# Altium PCB SFCslaver.PcbDoc (part 4 of 6)
Units mm, origin at the board's own origin, x right, y up, seen from the top; angles counter-clockwise.
Board outline 149.66 x 75.74 mm, 2 copper layers (Top Layer, Bottom Layer); 284 components, 212 nets, 830 pads, 310 vias.
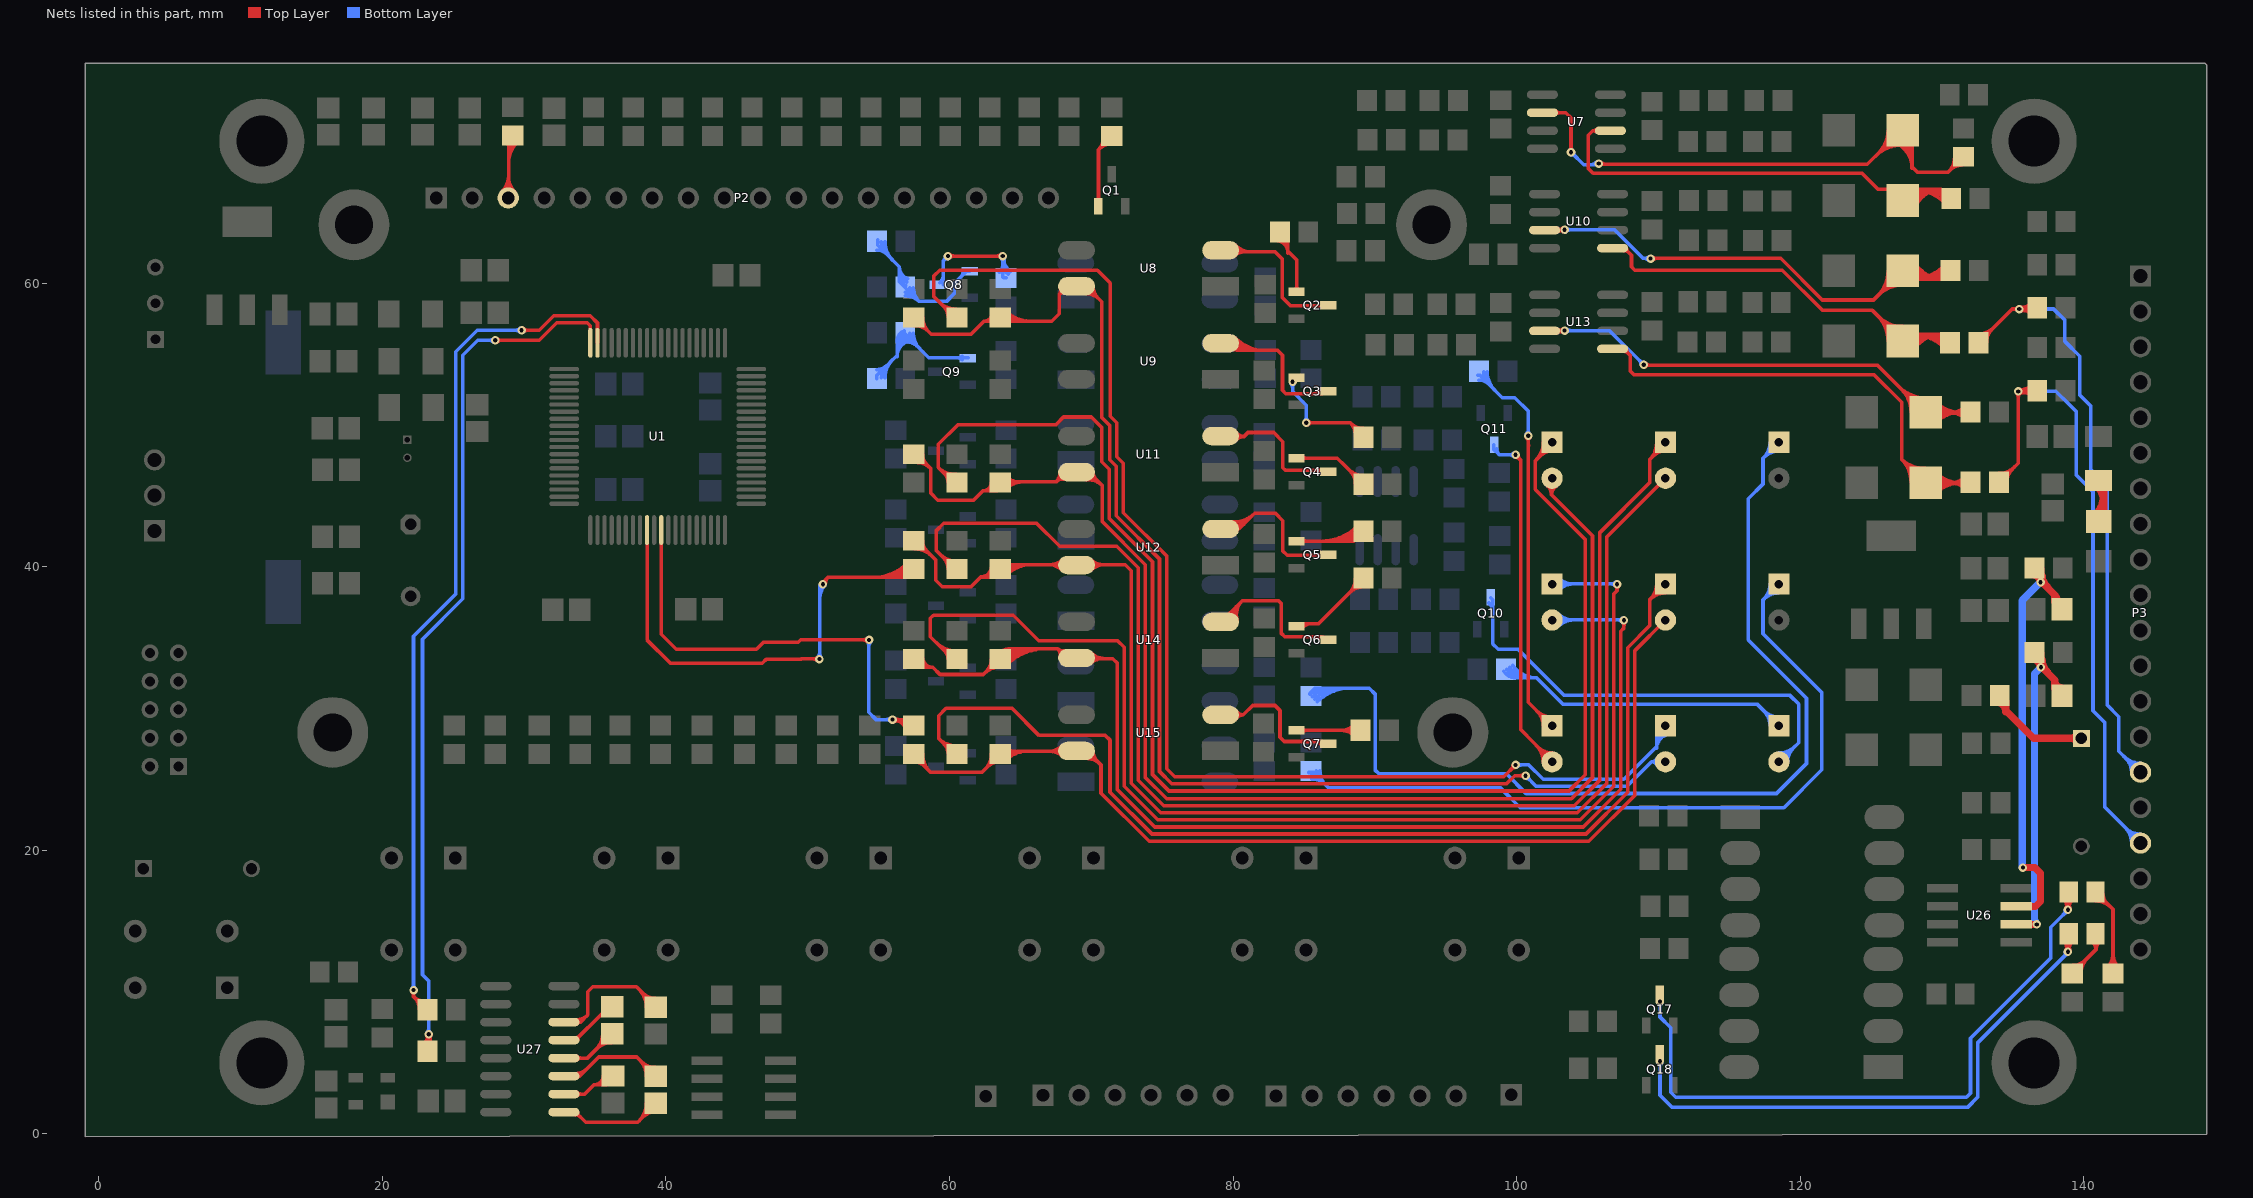
[diagram p4: the nets of this part, all layers, seen from the top]

## Via types
v1: diameter 0.6, hole 0.3, Top Layer to Bottom Layer, 310 vias

## Nets (pads, with @x,y where several pads share a name; then routed paths per layer and width w, separated by ;. In a path a pad name is that pad's centre, name@x,y a point inside that pad or via, vN(x,y) a via of type N, cw(c..) or ccw(c..) an arc to the next point about the centre after c; other vN are vias at no path point) (continued)
LEVEL_LOW1: R80.2 U1.29 | length 44.3
  Top Layer w0.254: U1.29@38.673,42.579 38.673,34.826 40.325,33.174 46.797,33.174 47.1,33.477 49.545,33.477 49.556,33.489 v1@50.687,33.489 ; 50.38,33.489 cw(c50.38,33.032) v1@50.703,33.355 ; 50.436,33.489 ccw(c50.436,33.867) v1@50.703,33.6 ; v1@50.952,38.76 51.435,39.243 ; v1@51.252,38.769 cw(c51.878,38.8) 51.435,39.243 ; 54.651,39.243 ccw(c54.651,42.603) R80.2@57.027,40.227 ; 55.264,39.243 ccw(c55.264,41.99) R80.2@57.206,40.048 ; 55.877,39.243 ccw(c55.877,41.377) R80.2@57.386,39.868 ; 56.49,39.243 ccw(c56.49,40.764) R80.2@57.566,39.688 ; R80.2@57.33,39.552 57.679,39.552 57.37,39.243 51.435,39.243
  Bottom Layer w0.254: v1@50.703,33.6 ccw(c50.346,33.956) 50.851,33.956 ; v1@50.851,33.528 50.851,38.684 50.927,38.76 v1(51.079,38.76) ; 50.851,33.834 ccw(c51.182,33.834) v1@50.948,33.6 ; 50.851,37.791 cw(c52.049,37.791) v1@51.202,38.638 ; 50.851,38.404 cw(c51.436,38.404) v1@51.022,38.818
  other v1: 50.825,33.477
LEVEL_LOW1_PORT: P3.15 R60.1 R62.2 | length 56.8
  Top Layer w0.254: R62.2@132.436,55.524 132.436,55.651 134.95,58.166 R60.1@136.675,58.166 ; R62.2@132.572,56.147 ccw(c132.572,57.016) R62.2@133.186,56.402 ; R62.2@132.572,56.401 ccw(c132.572,57.883) 133.619,56.835 ; R62.2@132.891,55.828 cw(c133.563,55.828) R62.2@133.088,56.304 ; R62.2@133.145,55.828 cw(c134.43,55.828) 133.521,56.737 ; v1@135.264,58.166 ccw(c135.264,59.653) R60.1@136.315,58.602 ; v1@135.336,58.044 ccw(c135.041,57.748) 135.041,58.166 ccw(c135.041,58.584) v1@135.336,58.288 ; v1@135.411,58.166 cw(c135.411,56.886) R60.1@136.315,57.791 ; v1@135.545,58.016 cw(c135.733,57.691) 135.83,58.054 ; v1@135.545,58.316 ccw(c135.668,58.529) 135.731,58.291 ; v1@135.581,58.044 cw(c135.876,57.748) 135.876,58.166 cw(c135.876,58.584) v1@135.581,58.288 ; v1@135.608,58.079 cw(c136.118,57.785) 135.966,58.354 ; v1@135.608,58.252 ccw(c136.006,58.482) 135.887,58.038 ; 135.877,58.166 ccw(c135.877,59.04) R60.1@136.495,58.422
  Bottom Layer w0.254: v1(135.458,58.166) 137.871,58.166 138.671,57.366 138.671,55.881 139.72,54.832 139.72,52.098 140.482,51.336 140.482,46.86 141.648,45.693 141.648,30.239 142.469,29.419 142.469,26.975 143.967,25.476 P3.15@144.345,25.476 ; v1@135.581,58.044 cw(c135.876,57.748) 135.876,58.166 cw(c135.876,58.584) v1@135.581,58.288 ; 142.84,26.604 ccw(c144,27.764) P3.15@144,26.123 ; 142.976,26.467 cw(c142.01,25.5) P3.15@143.377,25.5 ; 143.273,26.17 ccw(c144,26.896) P3.15@144,25.869 ; 143.41,26.033 cw(c142.877,25.5) P3.15@143.631,25.5 ; P3.15@144.501,25.632 144.501,25.603 144.528,25.576 P3.15@144.528,25.5
LEVEL_LOW2: R102.2 U1.31 | length 38.1
  Top Layer w0.254: U1.31@39.673,42.579 39.673,35.238 40.738,34.172 46.384,34.172 46.883,34.671 49.327,34.671 49.505,34.849 54.305,34.849 v1(54.331,34.823) ; 53.852,34.849 cw(c53.852,34.344) v1@54.208,34.701 ; 53.974,34.849 ccw(c53.974,35.18) v1@54.208,34.946 ; v1@55.931,29.21 v1(55.982,29.21) ; v1@56.068,29.06 cw(c56.277,28.698) 56.385,29.102 cw(c56.493,29.505) v1@56.131,29.297 ; v1@56.104,29.088 cw(c56.399,28.792) 56.399,29.21 cw(c56.399,29.628) v1@56.104,29.332 ; 56.353,29.21 cw(c56.353,28.371) R102.2@57.135,28.676 ; 56.725,29.21 cw(c56.725,28.516) R102.2@57.371,28.768 ; R102.2@56.898,28.584 ccw(c55.982,28.226) v1(55.982,29.21) ; R102.2@57.414,28.724 R102.2@57.558,28.579 ; R102.2@57.482,28.792 57.064,29.21 v1(55.982,29.21)
  Bottom Layer w0.254: v1@54.208,34.701 cw(c53.974,34.467) 54.305,34.467 ; v1@54.254,34.849 54.356,34.849 54.356,34.773 54.305,34.722 54.305,29.718 54.813,29.21 v1(55.982,29.21) ; 54.305,34.344 cw(c54.81,34.344) v1@54.453,34.701 ; v1@55.859,29.088 ccw(c55.564,28.792) 55.564,29.21 ccw(c55.564,29.628) v1@55.859,29.332
LEVEL_LOW2_PORT: P3.17 R82.1 R84.2 | length 58.1
  Top Layer w0.254: R84.2@134.01,46.318 ccw(c134.01,47.27) R84.2@134.684,46.597 ; R84.2@134.01,46.572 ccw(c134.01,48.137) 135.117,47.03 ; R84.2@134.226,46.545 134.633,46.545 135.382,47.295 v1@135.382,52.4 ; R84.2@134.583,45.999 cw(c135.784,45.999) 134.935,46.848 ; v1@135.26,52.227 cw(c134.964,51.932) 135.382,51.932 cw(c135.8,51.932) 135.504,52.227 cw(c135.922,51.809) 135.922,52.4 ; v1@135.468,52.2 cw(c135.761,51.693) 135.913,52.258 ; v1@135.468,52.499 ccw(c135.594,52.716) 135.658,52.474 ; v1@135.532,52.263 cw(c136.039,51.97) 135.887,52.536 ; v1@135.532,52.436 ccw(c135.748,52.561) 135.684,52.319 ; 135.971,52.4 ccw(c135.971,53.112) R82.1@136.489,52.623 ; 135.98,52.4 cw(c135.98,51.69) R82.1@136.491,52.183 ; R82.1@136.304,52.798 cw(c135.382,53.668) v1@135.382,52.4 ; R82.1@136.308,52.007 ccw(c135.382,51.114) v1@135.382,52.4 ; R82.1@136.605,52.404 R82.1@136.755,52.404 ; R82.1@136.703,52.4 v1@135.382,52.4
  Bottom Layer w0.254: v1@135.357,52.404 135.386,52.375 138.024,52.375 138.934,51.465 138.941,51.465 139.484,50.922 139.484,46.447 140.65,45.28 140.65,29.826 141.471,29.005 141.471,23.045 P3.17@144.016,20.5 ; v1@135.504,52.227 cw(c135.861,51.87) 135.861,52.375 ; v1@135.504,52.472 ccw(c135.738,52.706) 135.738,52.375 ; 142.925,21.59 cw(c141.835,20.5) P3.17@143.377,20.5 ; 142.963,21.552 ccw(c144,22.589) P3.17@144,21.123 ; 143.359,21.157 cw(c142.702,20.5) P3.17@143.631,20.5 ; 143.397,21.119 ccw(c144,21.722) P3.17@144,20.869
  other v1: 135.382,52.349
MCU_RXD0: R149.1 U1.80 | length 67.8
  Top Layer w0.254: R149.1@22.893,6.362 ccw(c22.517,7.01) v1(23.266,7.01) ; R149.1@23.021,6.142 ccw(c22.773,6.569) 23.266,6.569 ; v1@23.121,6.916 cw(c22.829,6.726) 23.166,6.636 cw(c23.503,6.545) v1@23.345,6.856 ; v1@23.144,6.888 cw(c22.849,6.593) 23.266,6.593 cw(c23.684,6.593) v1@23.389,6.888 ; v1@23.18,6.861 cw(c22.971,6.499) 23.374,6.607 cw(c23.778,6.715) v1@23.416,6.924 ; R149.1@23.241,5.766 23.266,5.791 v1(23.266,7.01) ; R149.1@23.578,6.28 cw(c24.279,7.01) v1(23.266,7.01) ; v1(27.965,55.956) 31.068,55.956 32.305,57.193 34.455,57.193 34.673,56.976 U1.80@34.673,55.779 ; v1@28.088,55.834 cw(c28.383,55.539) 28.383,55.956 cw(c28.383,56.374) v1@28.088,56.079
  Bottom Layer w0.254: v1@23.144,7.133 ccw(c22.849,7.428) 23.266,7.428 ccw(c23.684,7.428) v1@23.389,7.133 ; v1(23.266,7.01) 23.266,10.77 22.835,11.201 22.835,34.874 25.682,37.722 25.682,48.288 25.672,48.298 25.672,54.907 26.721,55.956 27.991,55.956 v1@28.042,56.007 ; v1@27.843,55.834 ccw(c27.548,55.539) 27.548,55.956 ccw(c27.548,56.374) v1@27.843,56.079
MCU_TXD0: R148.1 U1.79 | length 66
  Top Layer w0.254: v1@22.077,10.012 cw(c21.782,9.717) 22.2,9.717 cw(c22.617,9.717) v1@22.322,10.012 ; v1@22.2,10.16 22.2,9.677 ; 22.267,9.61 cw(c21.445,8.788) R148.1@22.608,8.788 ; R148.1@22.572,9.305 ccw(c23.066,9.799) R148.1@23.145,9.105 ; R148.1@23.116,9.357 cw(c22.99,10.468) 22.2,9.677 ; R148.1@23.19,8.687 22.2,9.677 ; v1@29.82,56.642 29.845,56.667 31.073,56.667 32.098,57.692 34.662,57.692 35.173,57.182 U1.79@35.173,55.779 ; v1@29.942,56.545 cw(c30.237,56.25) 30.237,56.667 cw(c30.237,57.085) v1@29.942,56.79
  Bottom Layer w0.254: v1@22.077,10.257 ccw(c21.782,10.552) 22.2,10.552 ccw(c22.617,10.552) v1@22.322,10.257 ; v1@22.2,10.16 22.2,35.077 25.183,38.061 25.183,48.081 25.173,48.091 25.173,55.145 26.695,56.667 v1(29.82,56.667) ; v1@29.697,56.545 ccw(c29.402,56.25) 29.402,56.667 ccw(c29.402,57.085) v1@29.697,56.79
  other v1: 22.2,10.135
NetC34_2: C34.2 R146.2 U26.7 | length 35.3
  Top Layer w0.508: U26.7@134.604,16.027 136.601,16.027 136.957,16.383 136.957,18.364 136.55,18.771 v1(135.712,18.771) ; R146.2@136.477,39.409 cw(c136.429,38.884) v1@136.957,38.884 ; R146.2@136.525,39.954 136.957,39.522 v1@136.957,38.989 ; R146.2@136.891,39.61 ccw(c137.308,39.34) v1@136.957,38.989 ; v1@136.924,38.92 ccw(c136.547,39.288) R146.2@137.062,39.4 ; v1@136.949,38.842 cw(c136.799,38.013) 137.491,38.494 ; R146.2@136.963,39.853 ccw(c139.066,39.853) 137.579,38.367 ; C34.2@138.039,37.287 ccw(c137.532,37.583) 137.947,37.998 ; C34.2@138.455,37.008 137.947,37.516 137.947,37.998 ; v1@136.957,38.989 137.947,37.998
  Bottom Layer w0.508: v1@135.661,18.771 135.661,37.617 v1@136.931,38.887
  other v1: 136.957,38.887
NetC35_2: C35.2 R147.2 U26.6 | length 29.6
  Top Layer w0.508: U26.6@135.128,14.757 v1(136.677,14.757) ; R147.2@136.465,33.446 cw(c136.4,32.892) v1@136.957,32.892 ; R147.2@136.517,33.939 136.957,33.499 v1@136.957,32.995 ; R147.2@136.89,33.644 ccw(c137.322,33.36) v1@136.957,32.995 ; v1@136.945,32.919 ccw(c136.367,33.323) R147.2@137.055,33.476 ; R147.2@136.963,33.889 ccw(c139.138,33.889) 137.6,32.351 ; v1@136.974,32.848 cw(c136.839,32.082) 137.476,32.528 ; C35.2@138.481,30.861 137.947,31.394 137.947,32.004 ; C35.2@138.49,31.436 cw(c138.516,32.004) 137.947,32.004 ; v1@136.957,32.995 137.947,32.004
  Bottom Layer w0.508: 136.525,15.236 ccw(c137.156,15.236) v1@136.71,14.79 ; v1@136.652,14.757 136.525,14.884 136.525,32.436 v1(136.982,32.893)
NetC36_1: C36.1 U27.3 | length 13.2
  Top Layer w0.254: U27.3@32.804,4.064 33.909,4.064 ; U27.3@33.604,3.983 ccw(c33.604,4.524) 33.987,4.142 ; U27.3@33.604,4.237 ccw(c33.604,5.391) 34.42,4.575 ; U27.3@33.752,3.975 cw(c33.909,3.881) 33.909,4.064 ; U27.3@33.752,4.153 ccw(c33.909,4.247) 33.909,4.064 ; 38.134,5.224 cw(c36.959,4.049) C36.1@38.621,4.049 ; 38.292,5.066 ccw(c39.244,6.018) C36.1@39.244,4.672 ; C36.1@38.568,4.79 cw(c37.827,4.049) C36.1@38.875,4.049 ; C36.1@38.725,4.633 ccw(c39.244,5.151) C36.1@39.244,4.418 ; C36.1@39.37,3.988 37.948,5.41 35.255,5.41 33.909,4.064
NetC36_2: C36.2 U27.1 | length 11.3
  Top Layer w0.254: U27.1@32.804,1.524 33.63,1.524 34.341,0.813 38.024,0.813 39.294,2.083 C36.2@39.294,2.108 ; U27.1@33.604,1.351 cw(c33.604,0.871) 33.943,1.21 ; U27.1@33.777,1.524 ccw(c34.132,1.524) 33.881,1.273 ; 38.098,0.887 ccw(c36.837,2.149) C36.2@38.621,2.149 ; 38.378,1.167 cw(c39.244,0.302) C36.2@39.244,1.526 ; 38.532,1.321 ccw(c37.704,2.149) C36.2@38.875,2.149
NetC37_1: C37.1 U27.5 | length 5.1
  Top Layer w0.254: U27.5@32.804,6.604 33.63,6.604 35.458,8.433 35.789,8.433 C37.1@36.271,8.915 ; U27.5@33.604,6.777 ccw(c33.604,7.257) 33.943,6.918 ; U27.5@33.777,6.604 cw(c34.132,6.604) 33.881,6.855
NetC37_2: C37.2 U27.4 | length 8.5
  Top Layer w0.254: U27.4@32.804,5.334 34.473,5.334 36.15,7.01 C37.2@36.22,7.01 ; U27.4@33.726,5.212 cw(c34.021,4.916) 34.021,5.334 cw(c34.021,5.752) U27.4@33.726,5.456 ; 35.084,5.945 ccw(c33.977,7.053) C37.2@35.543,7.053 ; 35.147,6.008 cw(c36.166,4.988) C37.2@36.166,6.43 ; C37.2@35.518,6.379 ccw(c34.844,7.053) C37.2@35.797,7.053 ; C37.2@35.581,6.441 cw(c36.166,5.856) C37.2@36.166,6.684
NetC38_2: C38.2 U27.6 | length 14.4
  Top Layer w0.254: U27.6@32.804,7.874 33.985,7.874 ; U27.6@33.599,7.793 ccw(c33.636,8.437) 34.092,7.981 ; U27.6@33.614,8.047 ccw(c33.679,9.196) 34.493,8.382 ; U27.6@33.734,7.76 cw(c33.985,7.54) 33.985,7.874 ; U27.6@33.734,7.988 ccw(c33.985,8.208) 33.985,7.874 ; 38.092,10.193 cw(c36.827,8.927) C38.2@38.617,8.927 ; 38.378,9.907 ccw(c39.24,10.769) C38.2@39.24,9.55 ; 38.526,9.759 cw(c37.694,8.927) C38.2@38.871,8.927 ; C38.2@39.319,8.966 37.922,10.363 34.849,10.363 34.493,10.008 34.493,8.382 ; 33.985,7.874 34.493,8.382
NetC39_1: C39.1 U27.2 | length 8.7
  Top Layer w0.254: U27.2@32.804,2.794 34.265,2.794 34.925,3.454 ; U27.2@33.726,2.672 cw(c34.021,2.376) 34.021,2.794 cw(c34.021,3.212) U27.2@33.726,2.916 ; 35.19,3.454 ccw(c35.19,4.118) C39.1@35.853,4.09 ; 35.455,3.454 ccw(c35.455,4.106) C39.1@36.106,4.079 ; C39.1@35.599,4.1 cw(c34.925,4.129) 34.925,3.454 ; C39.1@35.72,3.454 ccw(c35.72,4.095) C39.1@36.36,4.068 ; C39.1@36.297,4.089 35.662,3.454 34.925,3.454
NetD1_1: D1.1 R161.2 | length 12.3
  Top Layer w0.254: D1.1@140.828,16.42 cw(c140.828,14.88) 141.917,15.969 ; D1.1@140.828,16.674 cw(c140.828,15.747) 141.484,16.403 ; D1.1@140.843,17.043 142.062,15.824 R161.2@142.062,11.312 ; D1.1@141.351,16.943 ccw(c142.335,16.943) 141.639,16.247 ; R161.2@141.657,11.718 ccw(c140.679,12.696) 142.062,12.696 ccw(c143.446,12.696) R161.2@142.467,11.718 ; R161.2@141.837,11.538 ccw(c141.292,12.083) 142.062,12.083 ccw(c142.832,12.083) R161.2@142.288,11.538
NetD1_2: D1.2 Q17.3 | length 50.3
  Top Layer w0.254: D1.2@138.562,16.569 cw(c137.81,15.798) v1(138.887,15.799) cw(c139.81,15.798) D1.2@139.247,16.529 ; v1@138.737,15.885 ccw(c138.376,16.094) 138.779,16.202 ; v1@138.765,15.921 ccw(c138.47,16.216) 138.887,16.216 ccw(c139.305,16.216) v1@139.01,15.921 ; 138.779,16.203 ccw(c139.183,16.311) v1@138.974,15.949 ; v1@138.801,15.949 ccw(c138.592,16.311) 138.996,16.203 ; v1(138.887,15.799) D1.2@138.887,17.12 ; 138.995,16.202 ccw(c139.398,16.094) v1@139.037,15.885
  Bottom Layer w0.254: v1@109.987,9.199 cw(c109.691,8.904) 110.109,8.904 cw(c110.527,8.904) v1@110.231,9.199 ; v1(110.109,9.322) 110.109,8.23 110.871,7.468 110.871,2.921 111.227,2.565 131.724,2.565 132.013,2.854 132.013,6.74 137.668,12.395 137.668,14.554 138.913,15.799 v1(138.887,15.799) ; 138.574,15.46 ccw(c138.235,15.799) v1@138.714,15.799 ; 138.635,15.521 cw(c138.887,15.269) v1@138.887,15.626
NetD2_1: D2.1 R162.2 | length 7.8
  Top Layer w0.254: R162.2@139.192,11.311 140.868,12.987 D2.1@140.868,14.173 ; R162.2@139.242,11.884 ccw(c139.242,13.146) 140.135,12.253 ; R162.2@139.561,11.311 cw(c140.452,11.311) R162.2@139.822,11.941 ; R162.2@139.815,11.311 cw(c141.319,11.311) 140.256,12.374 ; D2.1@140.553,13.552 cw(c140.203,12.986) 140.868,12.986 cw(c141.646,12.986) D2.1@141.157,13.59
NetD2_2: D2.2 Q18.3 | length 44.7
  Top Layer w0.254: D2.2@138.558,13.627 cw(c137.763,12.832) v1@138.887,12.832 ; v1@138.737,12.914 ccw(c138.372,13.125) 138.78,13.234 ; v1@138.765,12.949 ccw(c138.47,13.245) 138.887,13.245 ccw(c139.305,13.245) v1@139.01,12.949 ; 138.781,13.228 ccw(c139.18,13.334) v1@138.974,12.977 ; v1@138.801,12.977 ccw(c138.592,13.339) 138.996,13.231 ; v1(138.887,12.827) cw(c139.862,12.826) D2.2@139.254,13.588 ; v1(138.887,12.827) D2.2@138.887,14.173 ; 138.995,13.23 ccw(c139.398,13.122) v1@139.037,12.913
  Bottom Layer w0.254: v1@109.987,4.983 cw(c109.691,4.688) 110.109,4.688 cw(c110.527,4.688) v1@110.231,4.983 ; v1@110.109,5.08 110.109,2.718 110.973,1.854 131.801,1.854 132.512,2.565 132.512,6.401 138.887,12.776 v1(138.887,12.827) ; 138.556,12.445 ccw(c138.174,12.827) v1@138.714,12.827 ; 138.679,12.568 cw(c138.887,12.359) v1@138.887,12.654
  other v1: 110.109,5.105
NetD3_1: D3.1 F1.1 | length 7.4
  Top Layer w0.508: D3.1@140.76,43.569 ccw(c139.15,45.18) 141.427,45.18 ; F1.1@140.895,45.724 cw(c139.612,44.441) 141.427,44.441 ; D3.1@141.119,43.21 ccw(c140.376,43.953) D3.1@141.427,43.953 ; D3.1@141.427,43.459 F1.1@141.427,46.355 ; 141.427,45.315 cw(c142.007,45.315) F1.1@141.597,45.724
NetD4_2: D4.2 R40.1 U7.2 | length 60.8
  Top Layer w0.254: U7.2@101.818,72.013 103.475,72.013 103.835,71.653 103.835,69.19 103.861,69.215 v1(103.835,69.215) ; U7.2@102.74,71.891 cw(c103.036,71.596) 103.036,72.013 cw(c103.036,72.431) U7.2@102.74,72.136 ; v1@103.713,69.337 ccw(c103.418,69.633) 103.835,69.633 ccw(c104.253,69.633) v1@103.958,69.337 ; v1(105.791,68.428) 105.791,68.351 105.816,68.377 124.739,68.377 D4.2@128.143,71.78 ; v1@105.913,68.55 ccw(c106.331,68.968) 106.331,68.377 ; 125.322,68.96 cw(c127.22,67.062) D4.2@127.22,69.746 ; 125.536,69.173 ccw(c123.941,70.769) D4.2@126.197,70.769 ; 125.756,69.393 cw(c127.22,67.929) D4.2@127.22,70 ; 125.97,69.607 ccw(c124.808,70.769) D4.2@126.451,70.769 ; D4.2@126.189,69.827 cw(c127.22,68.796) D4.2@127.22,70.254 ; D4.2@126.788,69.841 cw(c125.983,68.113) 127.889,68.113 ; D4.2@126.895,70.072 cw(c126.168,68.512) 127.889,68.512 ; D4.2@127.002,70.302 cw(c126.354,68.91) 127.889,68.91 ; D4.2@127.11,70.532 cw(c126.54,69.309) 127.889,69.309 ; D4.2@127.217,70.762 cw(c126.725,69.708) D4.2@127.889,69.708 ; D4.2@127.279,70.714 127.889,70.104 127.889,68.199 128.27,67.818 130.429,67.818 R40.1@131.521,68.91 ; 130.464,67.853 ccw(c129.417,68.901) R40.1@130.898,68.901 ; 130.562,67.951 cw(c131.471,67.042) R40.1@131.471,68.328 ; R40.1@130.898,68.287 ccw(c130.284,68.901) R40.1@131.152,68.901 ; R40.1@130.996,68.385 cw(c131.471,67.91) R40.1@131.471,68.582
  Bottom Layer w0.254: v1@103.835,69.042 cw(c103.835,68.563) 104.174,68.902 ; v1@103.907,69.168 104.737,68.339 v1@105.804,68.339 ; v1@104.008,69.215 ccw(c104.365,69.215) 104.113,68.963 ; 105.159,68.339 ccw(c105.159,69.06) v1@105.669,68.55
NetD5_2: D5.2 R41.1 U7.6 | length 48.6
  Top Layer w0.254: U7.6@105.696,70.621 ccw(c105.4,70.326) 105.4,70.743 ccw(c105.4,71.161) U7.6@105.696,70.866 ; U7.6@106.618,70.743 105.363,70.743 105.047,70.427 105.047,68.987 105.056,68.978 105.056,68.076 105.391,67.742 124.358,67.742 125.501,66.599 R41.1@129.952,66.599 ; D5.2@127.226,65.813 cw(c128.415,65.306) 128.415,66.599 ; D5.2@127.46,65.713 cw(c128.8,65.143) 128.8,66.599 ; D5.2@127.499,64.83 D5.2@127.499,65.003 ; D5.2@127.694,65.614 cw(c129.184,64.979) 129.184,66.599 ; D5.2@127.864,66.599 cw(c127.864,63.232) R41.1@130.245,65.613 ; D5.2@127.927,65.514 cw(c129.568,64.815) 129.568,66.599 ; D5.2@128.161,65.415 cw(c129.952,64.652) R41.1@129.952,66.599 ; 128.478,66.599 cw(c128.478,63.846) R41.1@130.424,65.792 ; 129.091,66.599 cw(c129.091,64.459) R41.1@130.604,65.972 ; 129.704,66.599 cw(c129.704,65.072) R41.1@130.784,66.152 ; R41.1@130.685,65.866 R41.1@129.952,66.599
NetD6_1: D6.1 R56.2 | length 100
  Top Layer w0.254: 59.3,58.638 ccw(c60.48,59.819) R56.2@60.48,58.15 ; 59.586,58.353 cw(c58.81,57.577) R56.2@59.907,57.577 ; 59.733,58.205 ccw(c60.48,58.952) R56.2@60.48,57.896 ; R56.2@60.454,57.484 58.903,59.036 58.903,60.503 59.309,60.909 70.434,60.909 71.349,59.995 71.349,50.611 71.806,50.154 71.806,47.741 72.263,47.284 72.263,43.798 75.315,40.746 75.315,25.747 75.887,25.176 96.448,25.176 96.452,25.171 99.085,25.171 v1(99.924,26.01) v1@99.949,26.01 ; v1@99.751,26.01 cw(c99.333,26.01) 99.628,25.714 cw(c99.924,25.419) v1@99.924,25.837
  Bottom Layer w0.254: v1@99.949,26.01 100.863,26.01 101.879,24.994 107.569,24.994 109.88,27.305 109.88,28.173 D6.1@110.564,28.857 ; v1@100.046,25.887 cw(c100.341,25.592) 100.341,26.01 cw(c100.341,26.427) v1@100.046,26.132 ; 109.88,27.179 cw(c110.897,27.179) D6.1@110.651,28.166 ; 109.88,27.505 cw(c110.816,27.505) D6.1@110.589,28.412 ; 109.88,27.83 cw(c110.735,27.83) D6.1@110.528,28.658 ; D6.1@109.88,28.155 cw(c110.653,28.155) D6.1@110.466,28.905
NetD6_2: D6.2 R54.1 R57.1 U8.4 | length 104.1
  Top Layer w0.254: R57.1@57.406,57.459 57.651,57.459 58.718,56.392 61.523,56.392 62.433,57.302 ; R57.1@57.532,57.004 cw(c57.532,55.616) 58.513,56.597 ; R57.1@57.532,57.258 cw(c57.532,56.483) R57.1@58.08,57.031 ; R57.1@57.851,57.577 ccw(c58.617,57.577) R57.1@58.075,57.035 ; R57.1@58.105,57.577 ccw(c59.484,57.577) 58.509,56.602 ; 62.761,57.302 ccw(c62.761,57.775) R54.1@63.219,57.657 ; 62.807,57.302 cw(c62.807,56.855) R54.1@63.123,57.171 ; R54.1@62.973,57.72 cw(c62.433,57.86) 62.433,57.302 ; R54.1@63.674,57.623 ccw(c64.447,58.395) 64.447,57.302 ; R54.1@63.854,57.802 ccw(c65.06,59.009) 65.06,57.302 ; R54.1@64.033,57.171 cw(c64.349,56.855) 64.349,57.302 ; R54.1@64.033,57.982 ccw(c65.673,59.622) 65.673,57.302 ; U8.4@67.823,59.586 cw(c67.489,59.46) 67.742,59.207 ; U8.4@68.119,59.285 ccw(c67.989,58.96) 67.742,59.207 ; U8.4@69.613,59.247 cw(c69.613,57.913) 70.556,58.857 ; U8.4@69.613,59.501 cw(c69.613,58.78) 70.123,59.29 ; U8.4@70.136,59.77 ccw(c71.326,59.77) 70.485,58.928 ; v1@100.512,25.125 ccw(c100.217,24.83) 100.217,25.248 ccw(c100.217,25.665) v1@100.512,25.37 ; v1(100.635,25.248) 99.867,25.248 99.292,24.672 75.684,24.672 74.816,25.54 74.816,40.54 71.764,43.592 71.764,47.077 71.307,47.534 71.307,49.947 70.739,50.515 70.739,58.674 69.647,59.766 68.301,59.766 67.742,59.207 ; D6.2@110.437,26.187 110.437,26.314 110.488,26.264 D6.2@110.515,26.264 ; 62.433,57.302 67.208,57.302 67.742,57.836 67.742,59.207
  Bottom Layer w0.254: v1@100.635,25.075 cw(c100.635,24.657) 100.93,24.952 cw(c101.225,25.248) v1@100.808,25.248 ; v1(100.635,25.248) 101.388,24.495 107.776,24.495 109.519,26.238 ; D6.2@109.933,25.972 ccw(c109.519,25.784) 109.519,26.238 ; D6.2@109.939,26.501 cw(c109.519,26.705) 109.519,26.238 ; D6.2@110.437,26.187 D6.2@110.488,26.238 ; D6.2@110.488,26.213 110.488,26.266 110.46,26.238 109.519,26.238
NetD7_2: D7.2 R61.1 U10.3 | length 61.3
  Top Layer w0.254: U10.3@102.032,63.754 v1(103.378,63.754) ; U10.3@102.893,63.61 cw(c103.239,63.264) v1@103.239,63.754 ; U10.3@102.893,63.855 ccw(c103.137,64.099) v1@103.137,63.754 ; 103.069,63.772 ccw(c103.105,63.908) v1@103.227,63.839 ; v1@103.227,63.839 cw(c102.981,63.977) 103.054,63.704 cw(c103.102,63.526) v1@103.245,63.644 ; v1@103.256,63.632 ccw(c102.96,63.336) 102.96,63.754 ccw(c102.96,64.172) v1@103.256,63.876 ; v1(109.449,61.722) 109.474,61.747 118.618,61.747 121.564,58.801 125.171,58.801 126.644,60.274 130.124,60.274 R61.1@130.632,60.782 ; v1@109.571,61.6 cw(c109.928,61.243) 109.928,61.747 ; v1@109.571,61.844 ccw(c109.805,62.078) 109.805,61.747 ; 125.464,59.094 ccw(c123.696,60.863) D7.2@126.197,60.863 ; 125.496,59.125 cw(c127.22,57.401) D7.2@127.22,59.84 ; 125.898,59.528 ccw(c124.563,60.863) D7.2@126.451,60.863 ; 125.929,59.559 cw(c127.22,58.268) D7.2@127.22,60.094 ; D7.2@126.331,59.961 ccw(c125.43,60.863) D7.2@126.705,60.863 ; D7.2@126.363,59.993 cw(c127.22,59.136) D7.2@127.22,60.348 ; D7.2@127.226,60.866 ccw(c128.293,61.532) D7.2@128.293,60.274 ; D7.2@127.441,61.001 ccw(c128.751,61.818) 128.751,60.274 ; D7.2@127.657,61.135 ccw(c129.209,62.103) 129.209,60.274 ; D7.2@127.863,60.274 ccw(c127.863,63.568) R61.1@130.192,61.239 ; D7.2@127.872,61.27 ccw(c129.666,62.389) 129.666,60.274 ; D7.2@127.943,60.139 cw(c128.269,59.813) D7.2@128.269,60.274 ; D7.2@128.088,61.404 ccw(c130.124,62.674) R61.1@130.124,60.274 ; 128.476,60.274 ccw(c128.476,62.955) R61.1@130.372,61.059 ; 129.089,60.274 ccw(c129.089,62.342) R61.1@130.551,60.88 ; 129.703,60.274 ccw(c129.703,61.729) R61.1@130.731,60.7
  Bottom Layer w0.254: v1@103.357,63.758 106.904,63.758 108.915,61.747 v1@109.55,61.747 ; v1@103.5,63.632 cw(c103.806,63.326) 103.806,63.758 ; v1@103.5,63.876 ccw(c103.786,64.162) 103.786,63.758 ; 108.97,61.747 cw(c108.97,61.243) v1@109.326,61.6 ; 109.092,61.747 ccw(c109.092,62.078) v1@109.326,61.844
NetD8_2: D8.2 R62.1 U10.5 | length 51.9
  Top Layer w0.254: U10.5@106.77,62.463 107.59,62.463 108.102,61.951 108.102,61.138 108.331,60.909 118.745,60.909 121.59,58.064 125.095,58.064 126.771,56.388 R62.1@129.997,56.388 ; U10.5@107.57,62.29 cw(c107.57,61.824) 107.9,62.153 ; U10.5@107.743,62.463 ccw(c108.113,62.463) 107.852,62.201 ; 125.452,57.707 cw(c123.655,55.91) D8.2@126.197,55.91 ; 125.525,57.635 ccw(c127.22,59.33) D8.2@127.22,56.933 ; 125.886,57.274 cw(c124.522,55.91) D8.2@126.451,55.91 ; 125.958,57.201 ccw(c127.22,58.463) D8.2@127.22,56.679 ; D8.2@126.319,56.84 cw(c125.389,55.91) D8.2@126.705,55.91 ; D8.2@126.392,56.768 ccw(c127.22,57.596) D8.2@127.22,56.425 ; D8.2@127.438,55.767 cw(c128.588,55.014) 128.588,56.388 ; D8.2@127.651,55.628 cw(c129.057,54.707) 129.057,56.388 ; D8.2@127.838,56.388 cw(c127.838,53.094) R62.1@130.167,55.423 ; D8.2@127.863,55.488 cw(c129.527,54.399) 129.527,56.388 ; D8.2@127.943,56.633 ccw(c128.535,57.224) 128.535,56.388 ; D8.2@128.076,55.349 cw(c129.997,54.092) R62.1@129.997,56.388 ; 128.451,56.388 cw(c128.451,53.707) R62.1@130.346,55.603 ; 129.064,56.388 cw(c129.064,54.32) R62.1@130.526,55.782 ; 129.677,56.388 cw(c129.677,54.934) R62.1@130.706,55.962 ; R62.1@130.658,55.728 R62.1@129.997,56.388
NetD9_1: D9.1 R75.2 | length 105.2
  Top Layer w0.254: 59.629,46.575 ccw(c60.445,47.391) R75.2@60.472,46.237 ; 59.639,46.564 cw(c58.993,45.918) R75.2@59.907,45.918 ; R75.2@60.466,46.491 cw(c60.425,48.21) 59.209,46.994 ; R75.2@61.114,45.775 60.428,45.775 59.209,46.994 ; 101.339,47.471 ccw(c100.04,48.77) D9.1@101.877,48.77 ; 101.672,47.804 cw(c102.5,46.976) D9.1@102.5,48.147 ; 101.773,47.905 ccw(c100.907,48.77) D9.1@102.131,48.77 ; D9.1@102.021,48.302 102.021,48.153 101.321,47.453 101.321,45.441 104.851,41.91 104.851,25.324 103.701,24.173 75.478,24.173 74.317,25.334 74.317,40.333 71.265,43.385 71.265,46.87 70.739,47.396 70.739,49.809 70.002,50.546 68.047,50.546 67.513,50.013 60.602,50.013 59.209,48.62 59.209,46.994
NetD9_2: D9.2 R77.1 R79.1 U11.4 | length 107.9
  Top Layer w0.254: R79.1@57.549,47.599 cw(c57.598,46.648) 58.272,47.322 ; R79.1@57.562,47.346 cw(c57.638,45.881) 58.676,46.918 ; R79.1@57.571,48.023 58.676,46.918 ; R79.1@58.105,47.918 ccw(c59.141,47.918) 58.408,47.185 ; 62.618,45.343 ccw(c62.618,45.935) R77.1@63.209,45.924 ; R77.1@62.876,45.343 ccw(c62.876,45.93) R77.1@63.463,45.919 ; R77.1@62.955,45.929 cw(c62.359,45.94) 62.359,45.343 ; R77.1@63.854,45.692 cw(c64.543,45.003) 64.543,45.978 ; R77.1@64.033,45.513 cw(c65.157,44.389) 65.157,45.978 ; R77.1@64.033,46.323 ccw(c64.866,47.156) 64.866,45.978 ; U11.4@67.79,46.653 cw(c66.859,46.636) 67.517,45.978 ; U11.4@68.179,46.157 ccw(c68.003,45.492) 67.517,45.978 ; U11.4@69.63,46.394 cw(c69.692,45.438) 70.369,46.115 ; U11.4@69.647,46.14 cw(c69.74,44.693) 70.766,45.718 ; U11.4@70.136,46.662 ccw(c70.893,46.662) 70.358,46.127 ; D9.2@102.127,45.731 cw(c101.625,45.059) 102.464,45.059 cw(c103.21,45.059) D9.2@102.823,45.697 ; D9.2@102.487,46.228 102.464,46.205 102.464,45.06 105.35,42.173 105.35,25.117 103.864,23.631 75.314,23.631 73.818,25.127 73.818,40.121 70.766,43.173 70.766,45.718 ; 58.676,46.918 58.676,45.191 59.184,44.683 61.698,44.683 62.359,45.343 ; 62.359,45.343 63.349,45.343 63.984,45.978 67.517,45.978 ; 67.517,45.978 68.174,46.634 69.85,46.634 70.766,45.718
NetD10_1: D10.1 R76.2 | length 99.9
  Top Layer w0.254: 59.334,40.87 ccw(c60.48,42.016) R76.2@60.48,40.395 ; 59.571,40.632 cw(c58.761,39.822) R76.2@59.907,39.822 ; 59.767,40.436 ccw(c60.48,41.149) R76.2@60.48,40.141 ; R76.2@60.086,39.895 60.086,40.118 59.08,41.123 59.08,42.545 59.593,43.057 66.137,43.057 67.767,41.427 71.8,41.427 73.319,39.908 73.319,24.92 75.108,23.132 104.071,23.132 105.849,24.91 105.849,42.375 109.378,45.903 109.378,47.529 ; R76.2@60.606,39.831 R76.2@60.708,39.831 ; 109.64,47.791 cw(c110.5,46.93) D10.1@110.5,48.147 ; 109.802,47.953 ccw(c109.009,48.747) D10.1@110.131,48.764 ; D10.1@109.877,48.76 cw(c108.173,48.734) 109.378,47.529 ; D10.1@110.5,48.755 110.5,48.651 109.378,47.529
NetD10_2: D10.2 R78.1 R80.1 U12.4 | length 107.8
  Top Layer w0.254: R80.1@57.253,41.838 57.66,41.838 59.031,40.466 59.031,39.044 59.489,38.587 61.523,38.587 62.205,39.268 ; R80.1@57.532,41.249 cw(c57.532,39.518) 58.756,40.742 ; R80.1@57.532,41.503 cw(c57.532,40.386) 58.322,41.176 ; R80.1@58.105,41.822 ccw(c59.141,41.822) 58.408,41.089 ; 62.503,39.268 ccw(c62.503,39.988) R78.1@63.213,39.873 ; 62.801,39.268 ccw(c62.801,39.939) R78.1@63.464,39.832 ; R78.1@62.962,39.913 cw(c62.205,40.036) 62.205,39.268 ; R78.1@63.674,39.776 cw(c64.533,38.917) 64.533,40.132 ; R78.1@63.854,39.596 cw(c65.147,38.303) 65.147,40.132 ; R78.1@63.934,39.908 64.158,40.132 72.39,40.132 72.82,39.702 72.82,24.714 74.901,22.633 104.277,22.633 106.348,24.704 106.348,42.089 D10.2@110.513,46.253 ; R78.1@63.959,39.704 63.4,39.704 62.964,39.268 62.205,39.268 ; R78.1@64.033,39.417 cw(c65.76,37.69) 65.76,40.132 ; R78.1@64.033,40.227 ccw(c64.263,40.457) R78.1@64.263,40.132 ; 66.993,40.132 cw(c66.993,38.788) U12.4@67.943,39.738 ; 67.107,40.132 ccw(c67.107,41.314) U12.4@67.943,40.478 ; 67.606,40.132 cw(c67.606,39.402) U12.4@68.123,39.918 ; U12.4@69.803,39.918 cw(c70.319,39.402) 70.319,40.132 ; U12.4@69.983,39.738 cw(c70.933,38.788) 70.933,40.132 ; U12.4@69.983,40.478 ccw(c70.818,41.314) 70.818,40.132
NetD11_2: D11.2 R83.1 U13.3 | length 55.9
  Top Layer w0.254: U13.3@101.97,56.621 103.382,56.621 v1@103.403,56.642 ; U13.3@102.893,56.498 cw(c103.188,56.203) 103.188,56.621 cw(c103.188,57.038) U13.3@102.893,56.743 ; U13.3@102.909,56.621 ccw(c102.909,57.111) v1@103.256,56.764 ; U13.3@103.012,56.621 cw(c103.012,56.276) v1@103.256,56.52 ; U13.3@103.027,56.578 cw(c103.09,56.345) v1@103.258,56.518 ; U13.3@103.034,56.58 ccw(c102.951,56.888) v1@103.228,56.728 ; v1@108.991,54.204 125.451,54.204 D11.2@128.702,50.952 ; v1@109.088,54.107 cw(c109.322,53.873) 109.322,54.204 ; v1@109.088,54.351 ccw(c109.445,54.708) 109.445,54.204 ; 126.977,52.677 ccw(c128.845,54.546) D11.2@128.845,51.903 ; 127.15,52.505 cw(c125.526,50.88) D11.2@127.822,50.88 ; 127.41,52.244 ccw(c128.845,53.679) D11.2@128.845,51.649 ; 127.583,52.071 cw(c126.393,50.88) D11.2@128.076,50.88 ; D11.2@127.844,51.81 ccw(c128.845,52.812) D11.2@128.845,51.395 ; D11.2@128.803,50.876 131.597,50.876 R83.1@131.699,50.978 ; D11.2@129.21,50.516 cw(c130.079,49.647) 130.079,50.876 ; D11.2@129.21,51.245 ccw(c130.099,52.134) 130.099,50.876 ; D11.2@129.389,50.337 cw(c130.692,49.034) 130.692,50.876 ; D11.2@129.389,51.424 ccw(c130.712,52.747) 130.712,50.876 ; D11.2@129.569,50.157 cw(c131.305,48.421) 131.305,50.876 ; D11.2@129.569,51.604 ccw(c131.325,53.36) R83.1@131.325,50.876 ; 130.567,50.876 cw(c130.567,49.409) R83.1@131.605,50.446 ; 130.686,50.876 ccw(c130.686,52.176) R83.1@131.605,51.257 ; 131.181,50.876 cw(c131.181,50.022) R83.1@131.785,50.626 ; 131.299,50.876 ccw(c131.299,51.562) R83.1@131.785,51.077
  Bottom Layer w0.254: v1(103.378,56.642) 106.553,56.642 v1@108.991,54.204 ; v1@103.5,56.52 cw(c103.796,56.224) 103.796,56.642 cw(c103.796,57.06) v1@103.5,56.764 ; v1@108.793,54.229 ccw(c108.375,54.229) 108.671,54.524 ccw(c108.966,54.82) v1@108.966,54.402
  other v1: 108.966,54.229
NetD12_2: D12.2 R84.1 U13.5 | length 53.9
  Top Layer w0.254: U13.5@106.77,55.351 106.825,55.296 107.594,55.296 108.026,54.864 108.026,53.772 108.255,53.543 125.197,53.543 127.152,51.587 127.152,47.574 ; U13.5@107.57,55.178 cw(c107.57,54.835) 107.813,55.077 ; U13.5@107.743,55.351 ccw(c108.236,55.351) 107.888,55.003 ; 127.564,47.162 ccw(c128.754,48.352) D12.2@128.817,46.67 ; 127.576,47.15 cw(c126.368,45.942) D12.2@128.077,45.914 ; D12.2@127.823,45.919 ccw(c125.534,45.956) 127.152,47.574 ; D12.2@127.976,46.75 ccw(c128.784,47.558) D12.2@128.826,46.417 ; D12.2@128,46.726 cw(c127.202,45.929) D12.2@128.33,45.91 ; D12.2@128.807,46.924 cw(c128.725,49.147) 127.153,47.574 ; D12.2@129.21,45.538 cw(c130.079,44.669) 130.079,45.898 ; D12.2@129.21,46.266 ccw(c130.099,47.155) 130.099,45.898 ; D12.2@129.389,45.358 cw(c130.692,44.056) 130.692,45.898 ; D12.2@129.389,46.446 ccw(c130.712,47.769) 130.712,45.898 ; D12.2@129.569,45.179 cw(c131.305,43.442) 131.305,45.898 ; D12.2@129.569,46.625 ccw(c131.325,48.382) R84.1@131.325,45.898 ; 130.625,45.898 ccw(c130.625,47.284) R84.1@131.605,46.304 ; 130.629,45.898 cw(c130.629,44.517) R84.1@131.605,45.493 ; 131.238,45.898 ccw(c131.238,46.671) R84.1@131.785,46.124 ; 131.242,45.898 cw(c131.242,45.13) R84.1@131.785,45.673 ; R84.1@131.447,46.104 cw(c131.222,46.146) 131.186,45.92 cw(c131.11,45.439) R84.1@131.524,45.696 ; R84.1@131.978,45.898 128.829,45.898 127.152,47.574
NetD13_1: D13.1 R97.2 | length 92.6
  Top Layer w0.254: 59.083,34.624 ccw(c60.48,36.021) R97.2@60.48,34.045 ; 59.517,34.19 ccw(c60.48,35.154) R97.2@60.48,33.791 ; 59.675,34.031 cw(c59.116,33.472) R97.2@59.907,33.472 ; R97.2@60.759,33.278 60.428,33.278 58.649,35.058 58.649,36.347 58.877,36.576 64.491,36.576 66.294,34.773 71.857,34.773 72.321,34.308 72.321,24.507 74.694,22.134 104.484,22.134 106.847,24.497 106.847,38.064 107.086,38.303 107.086,38.837 107.01,38.76 v1(107.086,38.76) ; v1@106.964,38.638 cw(c106.669,38.343) 107.086,38.343 cw(c107.504,38.343) v1@107.209,38.638
  Bottom Layer w0.254: D13.1@102.465,38.782 v1@107.01,38.782 ; D13.1@102.761,38.509 cw(c103.42,37.85) 103.42,38.782 ; D13.1@102.761,39.031 ccw(c103.361,39.631) 103.361,38.782 ; D13.1@102.941,38.329 cw(c104.034,37.236) 104.034,38.782 ; D13.1@102.941,39.211 ccw(c103.975,40.245) 103.975,38.782 ; 106.616,38.782 cw(c106.616,38.29) v1@106.964,38.638 ; 106.721,38.782 ccw(c106.721,39.125) v1@106.964,38.883
NetD13_2: D13.2 R99.1 R101.1 U14.4 | length 107.5
  Top Layer w0.254: R101.1@57.344,33.449 ccw(c57.968,33.525) R101.1@57.968,32.897 ; R101.1@57.507,33.456 58.066,32.897 58.828,32.897 ; R101.1@57.597,33.48 ccw(c58.255,33.56) 58.255,32.897 ; R101.1@57.849,33.511 ccw(c58.541,33.595) 58.541,32.897 ; R101.1@58.101,33.541 ccw(c58.828,33.63) 58.828,32.897 ; 62.446,32.451 cw(c63.528,31.368) R99.1@63.528,32.899 ; 62.593,32.598 ccw(c61.719,33.472) R99.1@62.955,33.472 ; R99.1@62.879,32.884 cw(c63.528,32.236) R99.1@63.528,33.153 ; R99.1@63.315,33.785 cw(c64.349,32.751) 64.349,34.214 ; R99.1@63.494,33.606 cw(c64.963,32.137) 64.963,34.214 ; R99.1@63.674,33.426 cw(c65.576,31.524) 65.576,34.214 ; R99.1@63.748,34.032 ccw(c63.889,34.688) 64.364,34.214 ; R99.1@63.854,33.246 cw(c66.189,30.911) 66.189,34.214 ; R99.1@64.033,33.067 cw(c66.802,30.298) 66.802,34.214 ; R99.1@64.187,33.6 cw(c64.831,33.747) 64.364,34.214 ; U14.4@67.797,33.642 ccw(c67.152,33.751) 67.615,34.214 ; U14.4@68.181,34.06 cw(c68.032,34.631) 67.615,34.214 ; U14.4@68.984,33.503 68.326,33.503 67.615,34.214 ; U14.4@68.986,33.503 71.526,33.503 71.822,33.207 71.822,24.3 74.487,21.635 104.691,21.635 107.346,24.29 107.346,35.439 107.569,35.662 107.569,36.271 107.518,36.22 v1(107.569,36.22) ; U14.4@69.803,33.744 ccw(c70.387,34.328) 70.387,33.503 ; U14.4@69.983,33.184 cw(c70.751,32.416) 70.751,33.503 ; U14.4@69.983,33.924 ccw(c71,34.942) 71,33.503 ; v1@107.447,36.098 cw(c107.151,35.803) 107.569,35.803 cw(c107.987,35.803) v1@107.691,36.098 ; 58.828,32.897 59.336,32.389 62.384,32.389 63.498,33.503 63.652,33.503 64.364,34.214 ; 64.364,34.214 67.615,34.214
  Bottom Layer w0.254: D13.2@102.487,36.246 107.544,36.246 v1(107.569,36.22) ; D13.2@102.761,35.969 cw(c103.429,35.301) 103.429,36.246 ; D13.2@102.761,36.491 ccw(c103.353,37.083) 103.353,36.246 ; D13.2@102.941,35.789 cw(c104.042,34.688) 104.042,36.246 ; D13.2@102.941,36.671 ccw(c103.966,37.696) 103.966,36.246 ; 107.09,36.246 cw(c107.09,35.741) v1@107.447,36.098 ; 107.213,36.246 ccw(c107.213,36.577) v1@107.447,36.343
NetD14_1: D14.1 R98.2 | length 81.8
  Top Layer w0.254: 59.621,27.481 cw(c58.932,26.792) R98.2@59.907,26.792 ; 59.66,27.442 ccw(c60.461,28.243) R98.2@60.476,27.111 ; R98.2@60.472,27.365 cw(c60.45,29.083) 59.235,27.868 ; R98.2@60.479,26.827 60.276,26.827 59.235,27.868 ; 109.432,37.704 cw(c110.5,36.636) D14.1@110.5,38.147 ; 109.438,37.711 ccw(c108.38,38.77) D14.1@109.877,38.77 ; D14.1@109.865,38.138 cw(c110.5,37.503) D14.1@110.5,38.401 ; D14.1@109.872,38.145 ccw(c109.247,38.77) D14.1@110.131,38.77 ; D14.1@110.513,38.786 109.378,37.651 109.378,35.816 107.845,34.284 107.845,24.084 104.898,21.136 74.281,21.136 71.323,24.094 71.323,27.762 70.993,28.092 66.319,28.092 64.414,29.997 59.76,29.997 59.235,29.472 59.235,27.868
NetD14_2: D14.2 R100.1 R102.1 U15.4 | length 85.4
  Top Layer w0.254: R102.1@57.457,26.7 57.66,26.903 57.66,26.496 58.676,25.48 62.283,25.48 63.324,26.522 R100.1@63.603,26.522 ; R102.1@57.532,26.219 cw(c57.532,25.24) 58.224,25.932 ; R102.1@57.851,26.792 ccw(c59.026,26.792) 58.195,25.961 ; R102.1@58.105,26.792 ccw(c59.893,26.792) 58.629,25.528 ; 62.503,25.701 ccw(c61.412,26.792) R100.1@62.955,26.792 ; 62.662,25.86 cw(c63.528,24.995) R100.1@63.528,26.219 ; R100.1@62.937,26.135 ccw(c62.28,26.792) R100.1@63.209,26.792 ; R100.1@63.553,26.344 64.183,26.975 69.723,26.975 70.688,26.01 70.688,24.023 74.086,20.625 105.092,20.625 108.344,23.877 108.344,34.077 D14.2@110.513,36.246 ; R100.1@63.854,26.566 cw(c64.84,25.58) 64.84,26.975 ; R100.1@64.033,26.387 cw(c65.453,24.967) 65.453,26.975 ; R100.1@64.033,27.197 ccw(c64.57,27.733) 64.57,26.975 ; 66.989,26.975 ccw(c66.989,28.324) U15.4@67.943,27.37 ; 67.111,26.975 cw(c67.111,25.799) U15.4@67.943,26.63 ; 67.602,26.975 ccw(c67.602,27.711) U15.4@68.123,27.19 ; U15.4@69.613,26.477 cw(c69.613,25.01) 70.65,26.047 ; U15.4@69.613,26.731 cw(c69.613,25.877) 70.217,26.481 ; U15.4@70.136,27 ccw(c71.194,27) 70.446,26.252
NetD15_1: D15.1 R120.1 | length 30.4
  Bottom Layer w0.254: R120.1@99.092,32.609 ccw(c99.952,33.202) 99.952,32.156 ; R120.1@99.301,32.753 ccw(c100.436,33.534) 100.436,32.156 ; R120.1@99.314,32.436 99.619,32.436 99.898,32.156 101.402,32.156 ; R120.1@99.51,32.897 ccw(c100.919,33.867) 100.919,32.156 ; R120.1@99.719,33.041 ccw(c101.402,34.2) 101.402,32.156 ; 117.435,29.834 ccw(c118.5,30.899) D15.1@118.5,29.393 ; 117.437,29.832 cw(c116.375,28.77) D15.1@117.877,28.77 ; D15.1@117.869,29.4 ccw(c118.5,30.032) D15.1@118.5,29.139 ; D15.1@117.871,29.399 cw(c117.242,28.77) D15.1@118.131,28.77 ; D15.1@118.491,28.778 116.992,30.277 103.282,30.277 101.402,32.156
NetD15_2: D15.2 Q10.3 | length 35.8
  Bottom Layer w0.254: Q10.3@98.049,37.431 cw(c97.385,36.767) 98.323,36.767 ; Q10.3@98.171,37.795 98.323,37.643 98.323,34.544 98.704,34.163 100.101,34.163 103.353,30.912 119.278,30.912 119.888,30.302 119.888,27.584 D15.2@118.516,26.213 ; D15.2@118.5,26.599 ccw(c118.5,27.571) 119.187,26.884 ; D15.2@118.5,26.853 ccw(c118.5,28.438) 119.621,27.317 ; D15.2@118.869,26.23 cw(c119.679,26.23) 119.106,26.803 ; D15.2@119.123,26.23 cw(c120.546,26.23) 119.54,27.236
NetD16_1: D16.1 R121.1 | length 35.8
  Top Layer w0.254: v1@100.69,49.103 cw(c100.395,48.808) 100.813,48.808 cw(c101.23,48.808) v1@100.935,49.103 ; 100.813,48.514 100.838,48.514 100.863,48.539 100.813,48.539 ; v1(100.813,49.225) 100.813,30.429 102.489,28.753 D16.1@102.489,28.727 ; 101.388,29.853 ccw(c102.5,30.965) D16.1@102.5,29.393 ; 101.456,29.785 cw(c100.441,28.77) D16.1@101.877,28.77 ; D16.1@101.822,29.42 ccw(c102.5,30.098) D16.1@102.5,29.139 ; D16.1@101.89,29.352 cw(c101.308,28.77) D16.1@102.131,28.77
  Bottom Layer w0.254: R121.1@97.269,53.505 97.396,53.505 98.984,51.918 99.873,51.918 100.813,50.978 v1(100.813,49.225) ; R121.1@97.349,53.149 cw(c97.349,52.174) 98.038,52.863 ; R121.1@97.668,53.722 ccw(c98.846,53.722) 98.013,52.888 ; R121.1@97.922,53.722 ccw(c99.714,53.722) 98.447,52.455 ; v1@100.69,49.348 ccw(c100.395,49.643) 100.813,49.643 ccw(c101.23,49.643) v1@100.935,49.348 ; D16.1@102.464,28.829 D16.1@102.464,28.854
NetD16_2: D16.2 Q11.3 | length 30.2
  Top Layer w0.254: v1@99.924,47.706 cw(c99.924,47.288) 100.219,47.584 cw(c100.514,47.879) v1@100.097,47.879 ; v1(99.924,47.879) 100.279,47.523 100.279,28.524 100.711,28.092 100.711,28.067 D16.2@102.514,26.264 ; 101.403,27.375 cw(c100.257,26.23) D16.2@101.877,26.23 ; 101.518,27.26 ccw(c102.5,28.241) D16.2@102.5,26.853 ; 101.836,26.942 cw(c101.124,26.23) D16.2@102.131,26.23 ; 101.952,26.826 ccw(c102.5,27.374) D16.2@102.5,26.599
  Bottom Layer w0.254: Q11.3@98.4,48.59 98.4,48.26 98.781,47.879 v1(99.924,47.879) ; Q11.3@98.594,48.312 ccw(c99.189,48.312) 98.768,47.891 ; v1@99.801,47.757 ccw(c99.506,47.461) 99.506,47.879 ccw(c99.506,48.297) v1@99.801,48.001
NetD17_1: D17.1 R134.2 | length 78.4
  Bottom Layer w0.254: R134.2@85.413,31.015 cw(c86.39,30.037) 86.39,31.42 ; R134.2@85.446,31.09 85.776,31.42 89.611,31.42 90.018,31.013 90.018,25.654 90.272,25.4 99.263,25.4 100.668,23.996 118.331,23.996 120.447,26.111 120.447,30.709 116.33,34.826 116.33,44.778 117.378,45.826 117.378,47.632 118.3,48.554 D17.1@118.3,48.782 ; R134.2@85.592,30.835 cw(c87.004,29.424) 87.004,31.42 ; R134.2@85.772,30.656 cw(c87.617,28.811) 87.617,31.42 ; R134.2@85.952,30.476 cw(c88.23,28.198) 88.23,31.42 ; 117.425,47.679 ccw(c116.334,48.77) D17.1@117.877,48.77 ; 117.464,47.718 cw(c118.5,46.682) D17.1@118.5,48.147 ; D17.1@117.859,48.113 ccw(c117.202,48.77) D17.1@118.131,48.77 ; D17.1@117.897,48.151 cw(c118.5,47.549) D17.1@118.5,48.401
NetD18_1: D18.1 R138.2 | length 60.1
  Bottom Layer w0.254: R138.2@85.344,25.476 85.649,25.476 86.741,24.384 98.868,24.384 100.254,22.998 118.852,22.998 121.523,25.669 121.523,31.12 117.378,35.265 117.378,37.65 D18.1@118.048,38.32 ; R138.2@85.546,25.021 cw(c85.546,23.674) 86.499,24.626 ; R138.2@85.546,25.275 cw(c85.546,24.541) R138.2@86.065,25.06 ; R138.2@85.865,25.594 ccw(c86.672,25.594) R138.2@86.102,25.023 ; R138.2@86.119,25.594 ccw(c87.539,25.594) 86.535,24.59 ; 117.433,37.705 cw(c118.5,36.639) D18.1@118.5,38.147 ; 117.438,37.71 ccw(c116.377,38.77) D18.1@117.877,38.77 ; D18.1@117.867,38.139 cw(c118.5,37.506) D18.1@118.5,38.401 ; D18.1@117.871,38.143 ccw(c117.245,38.77) D18.1@118.131,38.77
NetJ2_1: J2.1 R150.1 | length 10
  Top Layer w0.508: R150.1@133.967,30.428 cw(c133.807,29.761) 134.493,29.761 ; R150.1@134.036,30.963 134.493,30.505 134.493,29.845 136.449,27.889 J2.1@140.157,27.889 ; J2.1@139.582,27.645 ccw(c138.992,27.054) 138.992,27.889 ccw(c138.992,28.725) J2.1@139.582,28.134
NetP2_3: P2.3 R13.2 | length 12.2
  Top Layer w0.254: P2.3@28.439,66.441 ccw(c27.315,67.565) 28.905,67.565 ; P2.3@28.619,66.261 ccw(c27.928,66.952) 28.905,66.952 ; R13.2@28.752,69.994 cw(c28.384,69.625) 28.905,69.625 ; P2.3@28.88,66.04 28.804,66.04 28.905,66.142 R13.2@28.905,70.129 ; 28.905,66.83 ccw(c29.71,66.83) P2.3@29.141,66.261 ; 28.905,67.443 ccw(c30.323,67.443) P2.3@29.321,66.441 ; 28.905,68.407 cw(c31.15,68.407) R13.2@29.563,69.994 ; 28.905,69.02 cw(c30.537,69.02) R13.2@29.383,70.174 ; 28.905,69.633 cw(c29.924,69.633) R13.2@29.204,70.353
NetQ1_1: Q1.1 R14.2 | length 8.7
  Top Layer w0.254: Q1.1@70.378,65.82 ccw(c70.058,66.14) 70.51,66.14 ; Q1.1@70.46,65.405 70.51,65.456 70.51,69.393 ; 70.51,66.091 ccw(c70.893,66.091) Q1.1@70.623,65.82 ; 70.578,69.46 cw(c71.4,68.638) R14.2@71.4,69.801 ; R14.2@70.831,70.309 cw(c69.72,70.184) 70.51,69.393 ; R14.2@70.883,69.765 ccw(c70.389,70.259) R14.2@71.083,70.338 ; R14.2@71.552,70.358 71.476,70.358 70.51,69.393
NetQ2_1: Q2.1 R19.2 | length 9.6
  Top Layer w0.254: R19.2@83.172,62.994 cw(c82.967,62.113) 83.871,62.113 ; R19.2@83.23,63.241 cw(c83.041,62.433) 83.871,62.433 ; R19.2@83.288,63.488 cw(c83.116,62.753) 83.871,62.753 ; R19.2@83.303,63.551 83.871,62.983 83.871,62.23 84.506,61.595 Q2.1@84.506,59.36 ; R19.2@83.346,63.736 cw(c83.191,63.074) R19.2@83.871,63.074 ; Q2.1@84.351,59.492 ccw(c83.976,59.867) 84.506,59.867 ; 84.506,59.708 ccw(c84.811,59.708) Q2.1@84.595,59.492
NetQ2_3: Q2.3 U8.2 | length 14.2
  Top Layer w0.254: U8.2@79.121,62.179 79.133,62.191 82.97,62.191 83.464,61.697 83.464,58.978 84.047,58.395 Q2.3@86.669,58.395 ; U8.2@79.963,62.501 ccw(c80.711,63.249) 80.711,62.191 ; U8.2@80.143,61.941 cw(c80.747,61.336) 80.747,62.191 ; U8.2@80.143,62.68 ccw(c81.324,63.862) 81.324,62.191 ; 85.969,58.395 ccw(c85.969,58.899) Q2.3@86.326,58.542 ; 86.092,58.395 cw(c86.092,58.064) Q2.3@86.326,58.298
NetQ3_1: Q3.1 R20.2 | length 12.6
  Top Layer w0.254: v1(85.166,50.14) 88.265,50.14 ; v1@85.289,50.017 cw(c85.584,49.722) 85.584,50.14 cw(c85.584,50.557) v1@85.289,50.262 ; 88.289,50.116 ccw(c89.195,51.022) R20.2@89.195,49.74 ; R20.2@88.623,49.2 ccw(c87.395,49.27) 88.265,50.14 ; R20.2@88.666,49.739 cw(c88.154,49.227) R20.2@88.877,49.185 ; R20.2@89.179,49.047 89.205,49.022 89.205,49.2 88.265,50.14
  Bottom Layer w0.254: v1@84.079,52.913 cw(c83.783,52.618) 84.201,52.618 cw(c84.619,52.618) v1@84.323,52.913 ; v1(84.201,53.035) 84.201,52.349 85.166,51.384 v1(85.166,50.14) ; v1@85.044,50.262 ccw(c84.749,50.557) 85.166,50.557 ccw(c85.584,50.557) v1@85.289,50.262
NetQ3_3: Q3.3 U9.2 | length 19.2
  Top Layer w0.254: U9.2@78.767,56.007 78.918,56.007 79.121,55.804 79.781,55.804 80.34,55.245 ; U9.2@79.604,55.587 ccw(c80.43,56.414) 80.43,55.245 ; U9.2@79.783,55.767 ccw(c81.044,57.027) 81.044,55.245 ; U9.2@79.963,55.947 ccw(c81.657,57.64) 81.657,55.245 ; U9.2@80.017,55.294 cw(c80.145,55.05) 80.34,55.245 ; U9.2@80.143,56.126 ccw(c82.27,58.253) 82.27,55.245 ; U9.2@80.265,55.58 ccw(c80.567,55.472) 80.34,55.245 ; 85.591,52.197 ccw(c85.591,53.236) Q3.3@86.326,52.501 ; Q3.3@86.204,52.197 ccw(c86.204,52.623) Q3.3@86.505,52.322 ; Q3.3@86.402,52.4 86.199,52.197 83.718,52.197 83.49,52.426 83.49,54.915 83.16,55.245 80.34,55.245
NetQ4_1: Q4.1 R21.2 | length 9.1
  Top Layer w0.254: Q4.1@84.473,47.647 87.354,47.647 87.909,47.092 R21.2@89.23,45.771 ; Q4.1@84.87,47.524 cw(c85.166,47.229) 85.166,47.647 cw(c85.166,48.064) Q4.1@84.87,47.769 ; 88.126,46.875 ccw(c89.195,47.944) R21.2@89.195,46.432 ; 88.255,46.746 cw(c87.368,45.859) R21.2@88.622,45.859 ; R21.2@88.56,46.441 ccw(c89.195,47.077) R21.2@89.195,46.178
NetQ4_3: Q4.3 U11.2 | length 11.6
  Top Layer w0.254: U11.2@79.146,49.174 80.772,49.174 ; U11.2@80.189,48.886 cw(c80.772,48.442) 80.772,49.174 ; U11.2@80.215,49.481 ccw(c80.772,49.833) 80.772,49.174 ; 85.813,46.787 cw(c85.813,46.061) Q4.3@86.326,46.574 ; Q4.3@86.487,46.689 86.39,46.787 83.693,46.787 83.515,46.965 83.515,48.802 82.863,49.454 81.051,49.454 80.772,49.174
NetQ5_1: Q5.1 R22.2 | length 14.2
  Top Layer w0.254: Q5.1@84.473,41.797 88.508,41.797 R22.2@89.23,42.52 ; Q5.1@84.87,41.675 cw(c85.166,41.38) 85.166,41.797 cw(c85.166,42.215) Q5.1@84.87,41.92 ; 86.235,41.797 ccw(c86.235,45.411) R22.2@88.79,42.856 ; 86.848,41.797 ccw(c86.848,44.798) R22.2@88.97,42.676 ; 87.462,41.797 ccw(c87.462,44.184) R22.2@89.149,42.497 ; 88.075,41.797 ccw(c88.075,43.571) R22.2@89.329,42.317
NetQ5_3: Q5.3 U12.2 | length 15.3
  Top Layer w0.254: U12.2@79.775,42.663 ccw(c79.917,43.88) 80.783,43.014 ; U12.2@79.781,42.697 80.467,42.697 ; U12.2@79.804,42.915 ccw(c79.995,44.543) 81.154,43.384 ; U12.2@79.834,43.168 ccw(c80.073,45.207) 81.525,43.755 ; U12.2@80.26,42.839 ccw(c80.467,42.92) 80.467,42.697 ; U12.2@80.286,42.548 cw(c80.467,42.513) 80.467,42.697 ; 85.908,40.797 ccw(c85.908,41.388) Q5.3@86.326,40.97 ; Q5.3@86.716,40.797 83.816,40.797 83.515,41.097 83.515,43.231 82.991,43.755 81.525,43.755 ; 80.467,42.697 81.525,43.755
NetQ6_1: Q6.1 R23.2 | length 10.3
  Top Layer w0.254: Q6.1@84.473,35.803 84.636,35.966 86.03,35.966 R23.2@89.23,39.167 ; Q6.1@84.87,35.681 cw(c85.56,34.991) 85.56,35.966 ; 88.21,38.147 ccw(c87.214,39.142) R23.2@88.622,39.142 ; 88.235,38.171 cw(c89.195,37.21) R23.2@89.195,38.569 ; R23.2@88.644,38.58 ccw(c88.082,39.142) R23.2@88.876,39.142 ; R23.2@88.668,38.605 cw(c89.195,38.078) R23.2@89.195,38.823
NetQ6_3: Q6.3 U14.2 | length 15.8
  Top Layer w0.254: U14.2@79.07,36.017 80.645,37.592 ; U14.2@79.787,36.098 cw(c80.66,36.33) 80.021,36.968 ; U14.2@80.033,36.163 cw(c81.152,36.461) 80.333,37.28 ; U14.2@80.278,36.229 cw(c81.645,36.592) 80.645,37.592 ; 85.55,35.052 cw(c85.55,33.955) Q6.3@86.326,34.731 ; Q6.3@86.163,35.052 cw(c86.163,34.568) Q6.3@86.505,34.91 ; Q6.3@86.97,34.849 86.411,34.849 86.208,35.052 83.642,35.052 83.414,35.281 83.414,37.389 83.21,37.592 80.645,37.592
NetQ7_1: Q7.1 R24.2 | length 8.5
  Top Layer w0.254: Q7.1@84.473,28.444 R24.2@88.922,28.444 ; Q7.1@84.87,28.322 cw(c85.166,28.027) 85.166,28.444 cw(c85.166,28.862) Q7.1@84.87,28.567 ; 87.6,28.444 ccw(c87.6,29.841) R24.2@88.587,28.853 ; 87.618,28.444 cw(c87.618,27.074) R24.2@88.587,28.043 ; 88.213,28.444 ccw(c88.213,29.227) R24.2@88.767,28.674 ; 88.231,28.444 cw(c88.231,27.687) R24.2@88.767,28.222
NetQ7_3: Q7.3 U15.2 | length 11.8
  Top Layer w0.254: U15.2@79.121,29.54 80.721,29.54 ; U15.2@80.215,29.261 cw(c80.721,28.942) 80.721,29.54 ; U15.2@80.215,29.819 ccw(c80.721,30.139) 80.721,29.54 ; 85.629,27.661 cw(c85.629,26.675) Q7.3@86.326,27.372 ; Q7.3@86.26,27.411 86.26,27.639 86.281,27.661 83.617,27.661 83.312,27.965 83.312,29.845 82.956,30.201 81.382,30.201 80.721,29.54
NetQ8_1: Q8.1 R3.2 R103.2 | length 20.1
  Bottom Layer w0.254: R3.2@54.88,62.318 cw(c54.88,61.343) 55.569,62.033 ; R3.2@54.94,63.043 54.94,62.662 56.464,61.138 ; R3.2@55.199,62.891 ccw(c56.378,62.891) 55.544,62.058 ; R3.2@55.453,62.891 ccw(c57.245,62.891) 55.978,61.624 ; R103.2@56.464,60.433 ccw(c57.103,60.433) R103.2@56.901,59.827 ; 56.464,60.785 ccw(c57.22,60.785) R103.2@56.981,60.068 ; R103.2@56.885,59.346 cw(c56.898,58.584) R103.2@57.438,59.123 ; R103.2@56.89,59.092 cw(c56.912,57.75) 57.861,58.699 ; R103.2@57.061,60.309 cw(c57.338,61.138) 56.464,61.138 ; R103.2@57.199,59.665 ccw(c57.932,59.665) R103.2@57.414,59.147 ; R103.2@57.453,59.665 ccw(c58.8,59.665) 57.847,58.713 ; 60.802,60.421 ccw(c60.379,60.843) Q8.1@60.977,60.843 ; Q8.1@61.425,60.843 61.224,60.843 60.325,59.944 60.325,59.233 59.792,58.699 57.861,58.699 ; 56.464,61.138 56.464,60.096 57.861,58.699
NetQ8_3: Q8.3 R105.1 | length 14.5
  Top Layer w0.254: v1(59.893,61.9) v1(63.754,61.9) ; v1@60.016,61.777 cw(c60.311,61.482) 60.311,61.9 cw(c60.311,62.317) v1@60.016,62.022 ; v1@63.632,61.777 ccw(c63.336,61.482) 63.336,61.9 ccw(c63.336,62.317) v1@63.632,62.022
  Bottom Layer w0.254: Q8.3@59.327,60.016 ccw(c58.754,60.589) 59.565,60.589 ; Q8.3@59.565,59.868 59.565,61.571 v1(59.893,61.9) ; v1@59.72,61.9 cw(c59.303,61.9) 59.598,61.604 cw(c59.893,61.309) v1@59.893,61.727 ; R105.1@63.529,60.769 ccw(c62.987,61.312) 63.754,61.312 ; v1@63.632,61.777 cw(c63.336,61.482) 63.754,61.482 cw(c64.172,61.482) v1@63.876,61.777 ; v1@63.667,61.75 cw(c63.447,61.369) 63.873,61.483 ; 63.754,61.399 ccw(c64.757,61.399) R105.1@64.133,60.614 ; 63.864,61.513 cw(c64.246,61.616) v1@63.904,61.813 ; R105.1@63.984,60.364 63.817,60.364 63.754,60.427 63.754,61.925 ccw(c65.175,61.925) R105.1@64.291,60.813
NetQ9_1: Q9.1 R6.2 R104.2 | length 21.2
  Bottom Layer w0.254: R6.2@54.88,53.264 54.88,53.483 56.312,54.915 56.312,55.88 56.769,56.337 56.769,56.515 58.547,54.737 60.839,54.737 60.86,54.716 Q9.1@61.317,54.716 ; R6.2@54.88,53.887 ccw(c54.88,54.862) 55.569,54.172 ; R6.2@55.199,53.314 cw(c56.378,53.314) 55.544,54.147 ; R6.2@55.453,53.314 cw(c57.245,53.314) 55.978,54.581 ; 56.312,54.812 cw(c57.469,54.812) R104.2@57.075,55.901 ; 56.312,55.175 cw(c57.338,55.175) R104.2@56.989,56.14 ; 56.312,55.537 cw(c57.207,55.537) R104.2@56.902,56.378 ; R104.2@56.312,55.899 cw(c57.076,55.899) R104.2@56.816,56.617 ; R104.2@56.88,55.867 cw(c56.88,54.569) 57.797,55.487 ; R104.2@56.88,56.121 cw(c56.88,55.436) R104.2@57.364,55.92 ; R104.2@57.199,56.44 ccw(c58.055,56.44) R104.2@57.45,55.834 ; R104.2@57.453,56.44 ccw(c58.922,56.44) 57.883,55.401 ; 60.536,54.737 cw(c60.536,54.22) Q9.1@60.902,54.585 ; 60.677,54.737 ccw(c60.677,55.055) Q9.1@60.902,54.83